# EAGLE board SparkFun_QwiicBus-Midpoint-Panel (EAGLE 9.6.2), part 1 of 3
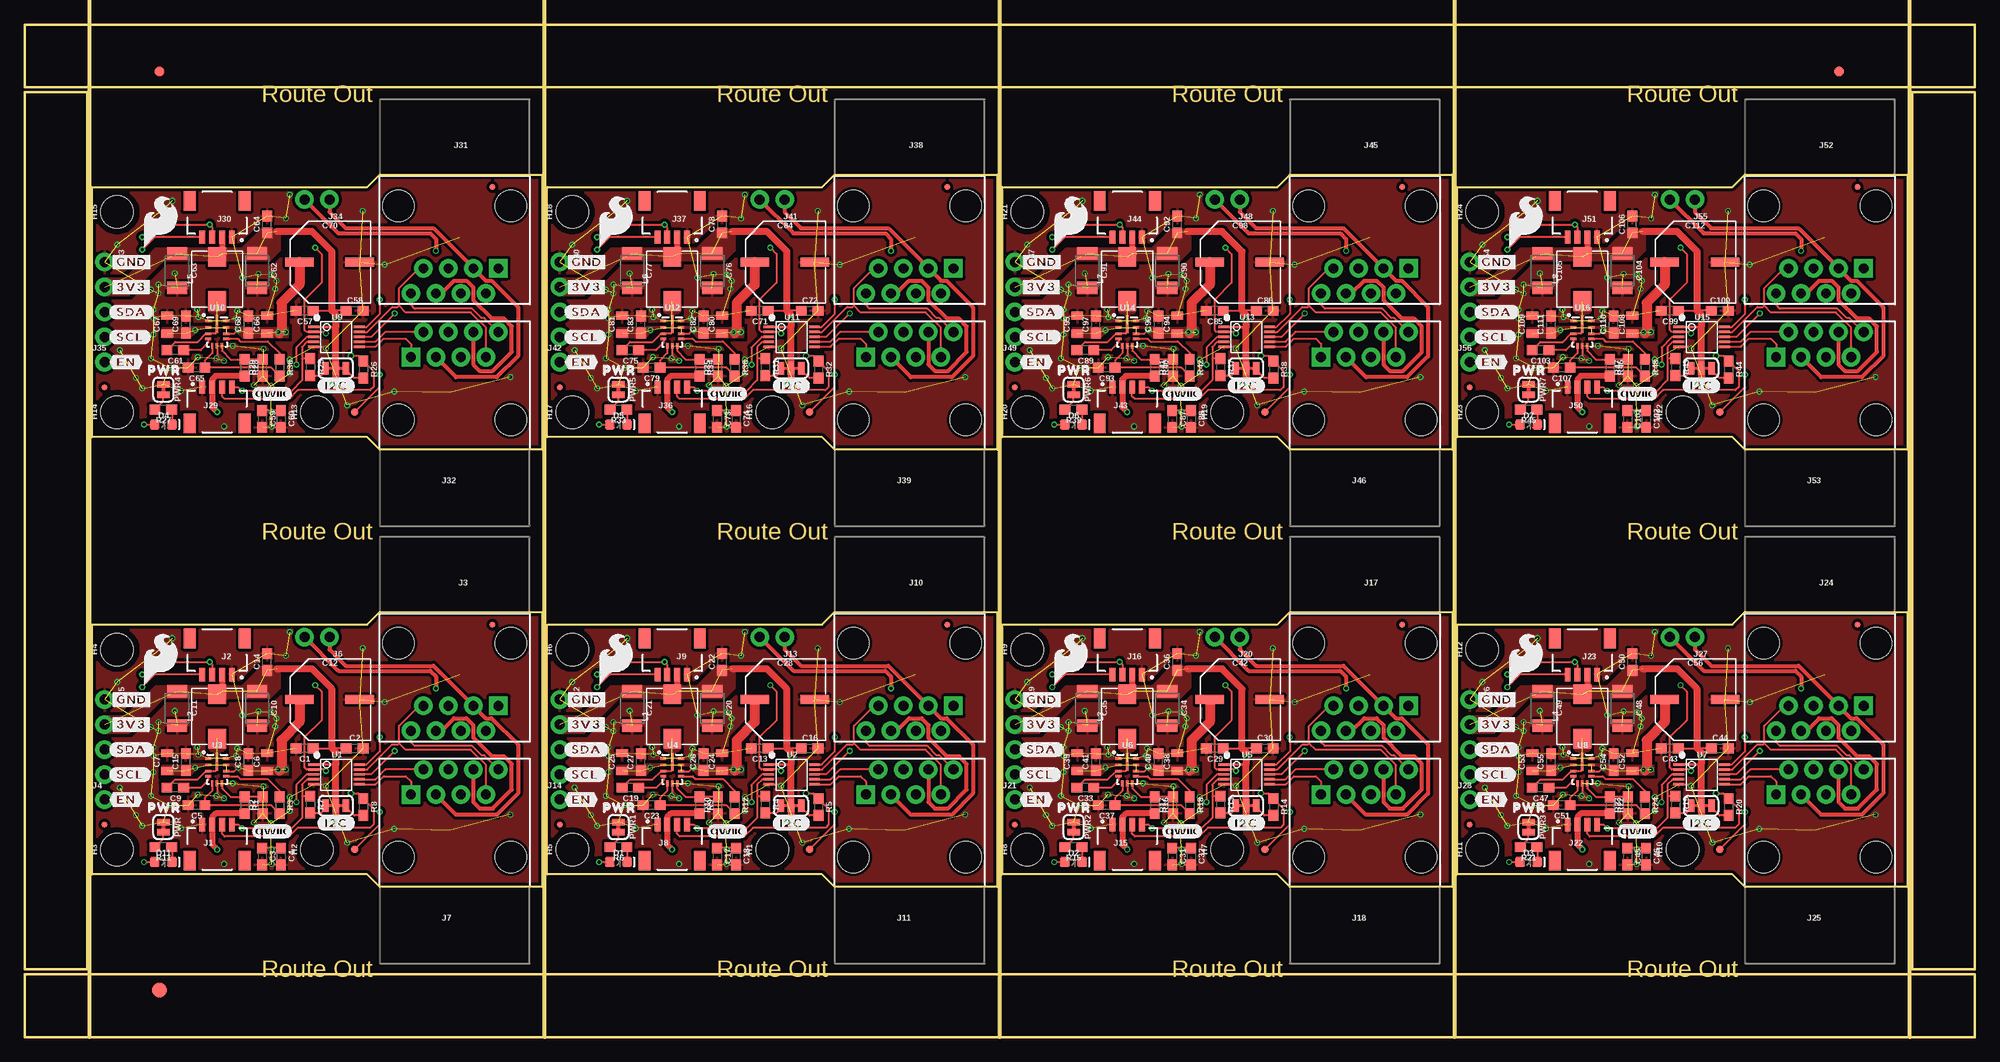
[diagram p0: board, top side]
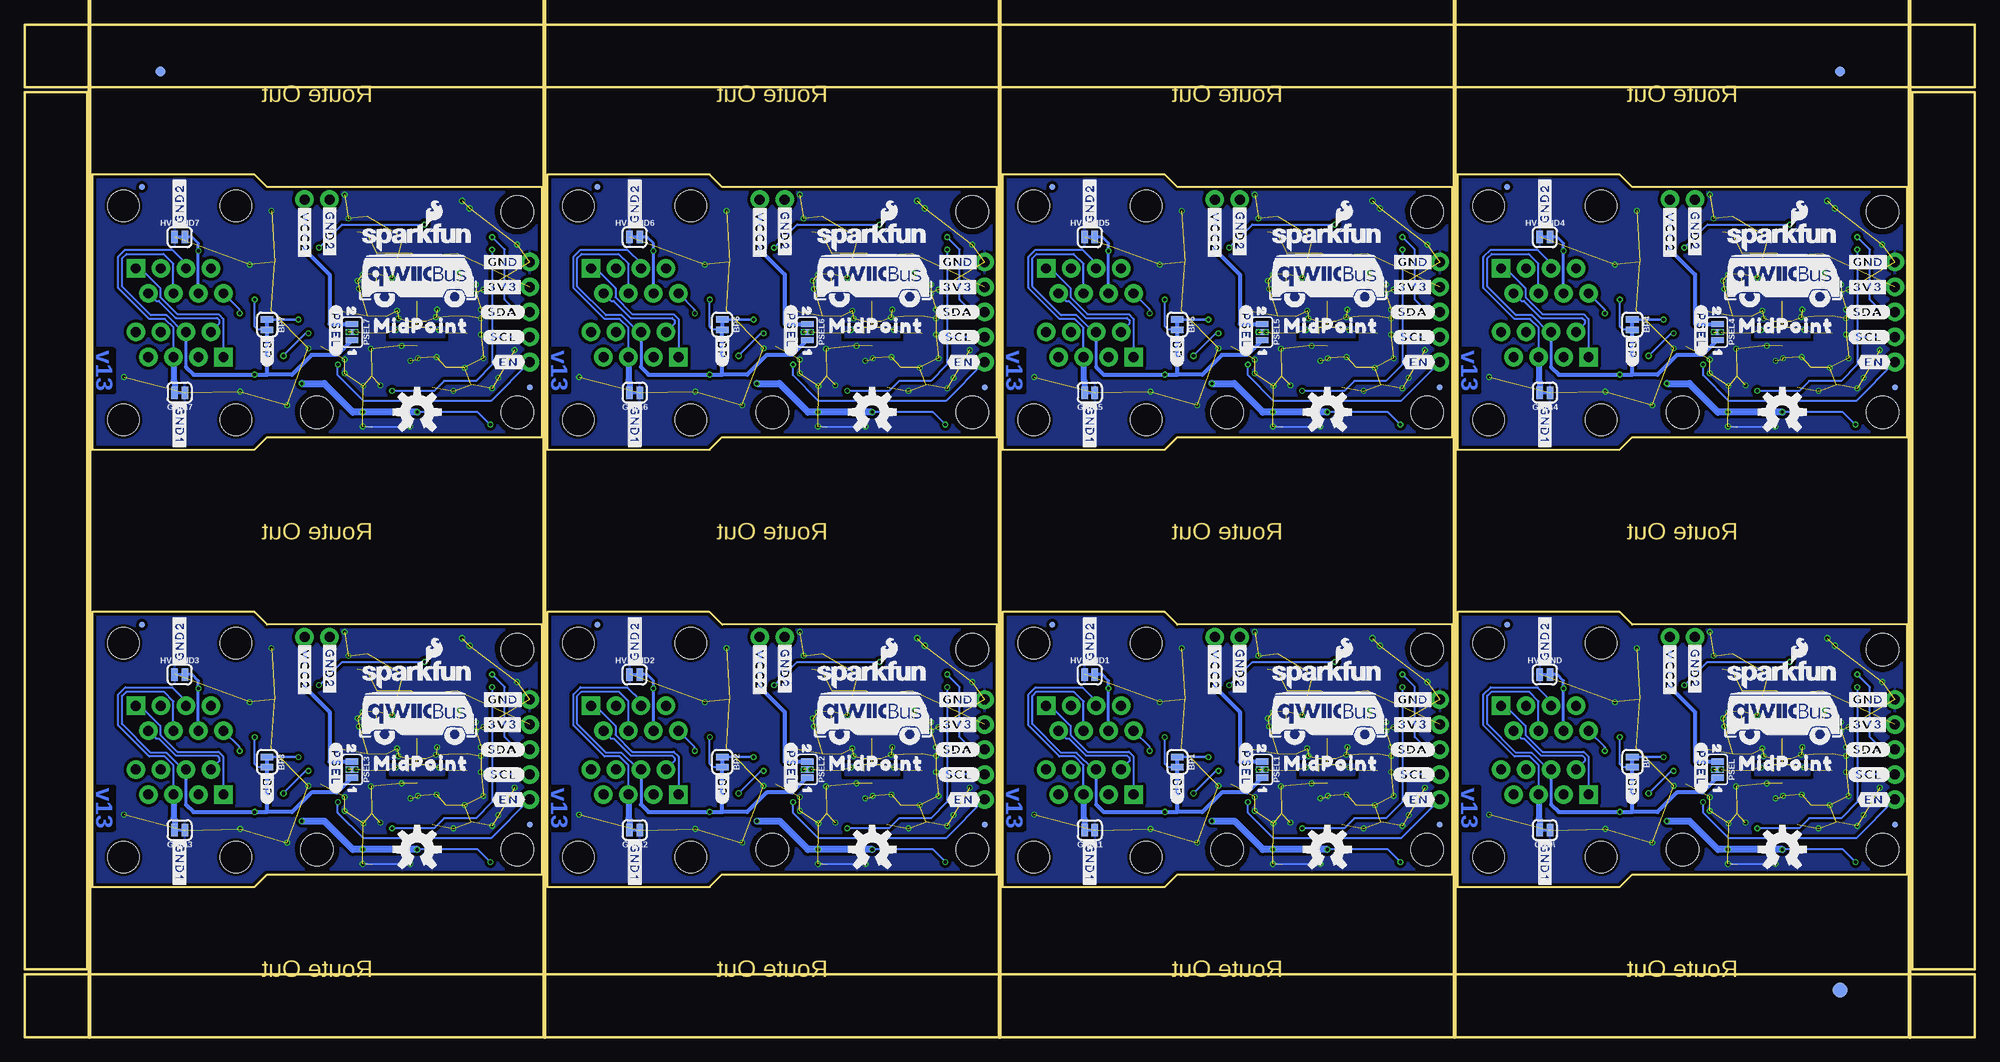
[diagram p1: board, bottom side, seen from below]

Size 198.12 x 102.87 mm. Coordinates in mm from the lower left corner, seen from the top.
Outline: 52.58,15.24 36.07,15.24 34.8,16.51 6.86,16.51 6.86,41.91 34.8,41.91 36.07,43.18 52.58,43.18 52.58,15.24
Outline: 98.81,15.24 82.3,15.24 81.03,16.51 53.09,16.51 53.09,41.91 81.03,41.91 82.3,43.18 98.81,43.18 98.81,15.24
Outline: 145.03,15.24 128.52,15.24 127.25,16.51 99.31,16.51 99.31,41.91 127.25,41.91 128.52,43.18 145.03,43.18 145.03,15.24
Outline: 191.26,15.24 174.75,15.24 173.48,16.51 145.54,16.51 145.54,41.91 173.48,41.91 174.75,43.18 191.26,43.18 191.26,15.24
Outline: 52.58,59.69 36.07,59.69 34.8,60.96 6.86,60.96 6.86,86.36 34.8,86.36 36.07,87.63 52.58,87.63 52.58,59.69
Outline: 98.81,59.69 82.3,59.69 81.03,60.96 53.09,60.96 53.09,86.36 81.03,86.36 82.3,87.63 98.81,87.63 98.81,59.69
Outline: 145.03,59.69 128.52,59.69 127.25,60.96 99.31,60.96 99.31,86.36 127.25,86.36 128.52,87.63 145.03,87.63 145.03,59.69
Outline: 191.26,59.69 174.75,59.69 173.48,60.96 145.54,60.96 145.54,86.36 173.48,86.36 174.75,87.63 191.26,87.63 191.26,59.69
Outline: 0,6.35 198.12,6.35 198.12,0 0,0 0,6.35
Outline: 191.77,96.01 198.12,96.01 198.12,6.86 191.77,6.86 191.77,96.01
Outline: 0,102.87 198.12,102.87 198.12,96.52 0,96.52 0,102.87
Outline: 0,96.01 6.35,96.01 6.35,6.86 0,6.86 0,96.01
Copper layers (1*16): Top 0.035mm / dielectric 1.5mm / Bottom 0.035mm
Design rules "SparkFun_QwiicBus-Midpoint": minimum track width 4mil, minimum drill 6mil, track to track 4mil, track to pad 4mil, pad to pad 4mil, via to via 4mil, smd to smd 4mil, copper to edge 4mil, drill to drill 4mil, minimum pad ring 5mil, minimum via ring 5mil, stop-mask expansion 4mil, vias tented up to drill 25mil, thermal gap 10mil
Net classes: 0 default: width 0.203 mm
Milling: 5 lines

## Footprints (pad centres in the part's own frame; a part is rotated, then mirrored left to right if it is on the bottom)
SMT-JUMPER_2_NC_TRACE_SILK = smd 0.66 x 1.27: 1 -0.521,0; 2 0.521,0
0603 = smd 1.1 x 1: 1 -0.85,0; 2 0.85,0
0805 = smd 0.8 x 1.2: 1 -0.9,0; 2 0.9,0
1210 = smd 1.27 x 2.06: 1 -1.755,0; 2 1.755,0
8X10.5 = smd 2.9 x 0.9: + -3.05,0; - 3.05,0
LED-0603 = smd 1 x 1: A -0.877,0; C 0.877,0
FIDUCIAL-1X2 = smd 1 x 1: 1 0,0
FIDUCIAL-1.5X3 = smd 1.5 x 1.5: 1 0,0
FIDUCIAL-MICRO = smd 0.635 x 0.635: 1 0,0
STAND-OFF = hole 3.302: 0,0
SMT-JUMPER_3_2-NC_TRACE_SILK = smd 0.66 x 1.27: 1 -1.041,0; 2 0,0; 3 1.041,0
JST04_1MM_RA = smd 0.6 x 1.35: 1 -1.5,0; 2 -0.5,0; 3 0.5,0; 4 1.5,0 | smd 1.2 x 2: NC1 2.8,-3.675; NC2 -2.8,-3.675
RJ45-8 = drill 1 pad 1.88 square: 1 -4.445,6.35 | drill 1 pad 1.88: 2 -3.175,8.89; 3 -1.905,6.35; 4 -0.635,8.89; 5 0.635,6.35; 6 1.905,8.89; 7 3.175,6.35; 8 4.445,8.89 | hole 3.2: -5.715,0; 5.715,0
1X01_NO_SILK = drill 1.016 pad 1.88: 1 0,0
1X04_NO_SILK = drill 1.016 pad 1.88: 1 0,0; 2 2.54,0; 3 5.08,0; 4 7.62,0
1X02_NO_SILK = drill 1.016 pad 1.88: 1 0,0; 2 2.54,0
INDUCTOR_5X5MM = smd 2 x 1.8: P$1 -2.25,0; P$2 2.25,0
SMT-JUMPER_3_NO_SILK = smd 0.635 x 1.27: 1 -0.813,0; 2 0,0; 3 0.813,0
PAD.03X.03 = smd 0.762 x 0.762: P$1 0,0
TSSOP10 = smd 1.1 x 0.25: 1 -2.259,1.018; 2 -2.259,0.517; 3 -2.259,0.018; 4 -2.259,-0.482; 5 -2.259,-0.988; 6 2.366,-0.988; 7 2.366,-0.482; 8 2.366,0.018; 9 2.366,0.517; 10 2.366,1.018
VQFN-HR-12 = smd 0.6 x 0.25: 1 -0.9,1.125; 2 -0.9,0.475; 3 -0.9,-0.175; 4 -0.9,-0.675; 8 0.9,-0.675; 9 0.9,-0.175; 10 0.9,0.475; 11 0.9,1.125 | smd 0.25 x 0.6: 5 -0.5,-1.4; 6 0,-1.4; 7 0.5,-1.4 | smd 0.25 x 1.824: 12 0,0.788

## Placement (x,y rotation side)
BP  JUMPER-SMT_2_NC_TRACE_SILK  [SMT-JUMPER_2_NC_TRACE_SILK]  34.8,27.94 270 bottom
BP1  JUMPER-SMT_2_NC_TRACE_SILK  [SMT-JUMPER_2_NC_TRACE_SILK]  81.03,27.94 270 bottom
BP2  JUMPER-SMT_2_NC_TRACE_SILK  [SMT-JUMPER_2_NC_TRACE_SILK]  127.25,27.94 270 bottom
BP3  JUMPER-SMT_2_NC_TRACE_SILK  [SMT-JUMPER_2_NC_TRACE_SILK]  173.48,27.94 270 bottom
BP4  JUMPER-SMT_2_NC_TRACE_SILK  [SMT-JUMPER_2_NC_TRACE_SILK]  34.8,72.39 270 bottom
BP5  JUMPER-SMT_2_NC_TRACE_SILK  [SMT-JUMPER_2_NC_TRACE_SILK]  81.03,72.39 270 bottom
BP6  JUMPER-SMT_2_NC_TRACE_SILK  [SMT-JUMPER_2_NC_TRACE_SILK]  127.25,72.39 270 bottom
BP7  JUMPER-SMT_2_NC_TRACE_SILK  [SMT-JUMPER_2_NC_TRACE_SILK]  173.48,72.39 270 bottom
C1  0.1uF  [0603]  28.45,29.34 180 top
C2  0.1uF  [0603]  33.53,29.34 0 top
C3  1.0uF  [0603]  24.13,18.35 270 top
C4  1.0uF  [0603]  26.04,18.35 270 top
C5  1.0uF  [0603]  17.46,23.56 180 top
C6  4.7uF  [0805]  24.64,27.94 90 top
C7  4.7uF  [0805]  14.48,27.94 90 top
C8  0.22uF  [0603]  22.73,27.94 90 top
C9  0.1uF  [0603]  15.3,25.34 180 top
C10  22uF  [1210]  23.62,33.4 270 top
C11  22uF  [1210]  15.49,33.4 270 top
C12  100uF  [8X10.5]  30.99,34.29 0 top
C13  0.1uF  [0603]  74.68,29.34 180 top
C14  0.1uF  [0603]  24.64,38.1 90 top
C15  0.22uF  [0603]  16.38,27.94 90 top
C16  0.1uF  [0603]  79.76,29.34 0 top
C17  1.0uF  [0603]  70.36,18.35 270 top
C18  1.0uF  [0603]  72.26,18.35 270 top
C19  0.1uF  [0603]  61.53,25.34 180 top
C20  22uF  [1210]  69.85,33.4 270 top
C21  22uF  [1210]  61.72,33.4 270 top
C22  0.1uF  [0603]  70.87,38.1 90 top
C23  1.0uF  [0603]  63.69,23.56 180 top
C24  4.7uF  [0805]  70.87,27.94 90 top
C25  4.7uF  [0805]  60.71,27.94 90 top
C26  0.22uF  [0603]  68.96,27.94 90 top
C27  0.22uF  [0603]  62.61,27.94 90 top
C28  100uF  [8X10.5]  77.21,34.29 0 top
C29  0.1uF  [0603]  120.9,29.34 180 top
C30  0.1uF  [0603]  125.98,29.34 0 top
C31  1.0uF  [0603]  116.59,18.35 270 top
C32  1.0uF  [0603]  118.49,18.35 270 top
C33  0.1uF  [0603]  107.76,25.34 180 top
C34  22uF  [1210]  116.08,33.4 270 top
C35  22uF  [1210]  107.95,33.4 270 top
C36  0.1uF  [0603]  117.09,38.1 90 top
C37  1.0uF  [0603]  109.92,23.56 180 top
C38  4.7uF  [0805]  117.09,27.94 90 top
C39  4.7uF  [0805]  106.93,27.94 90 top
C40  0.22uF  [0603]  115.19,27.94 90 top
C41  0.22uF  [0603]  108.84,27.94 90 top
C42  100uF  [8X10.5]  123.44,34.29 0 top
C43  0.1uF  [0603]  167.13,29.34 180 top
C44  0.1uF  [0603]  172.21,29.34 0 top
C45  1.0uF  [0603]  162.81,18.35 270 top
C46  1.0uF  [0603]  164.72,18.35 270 top
C47  0.1uF  [0603]  153.99,25.34 180 top
C48  22uF  [1210]  162.31,33.4 270 top
C49  22uF  [1210]  154.18,33.4 270 top
C50  0.1uF  [0603]  163.32,38.1 90 top
C51  1.0uF  [0603]  156.15,23.56 180 top
C52  4.7uF  [0805]  163.32,27.94 90 top
C53  4.7uF  [0805]  153.16,27.94 90 top
C54  0.22uF  [0603]  161.42,27.94 90 top
C55  0.22uF  [0603]  155.07,27.94 90 top
C56  100uF  [8X10.5]  169.67,34.29 0 top
C57  0.1uF  [0603]  28.45,73.79 180 top
C58  0.1uF  [0603]  33.53,73.79 0 top
C59  1.0uF  [0603]  24.13,62.8 270 top
C60  1.0uF  [0603]  26.04,62.8 270 top
C61  0.1uF  [0603]  15.3,69.79 180 top
C62  22uF  [1210]  23.62,77.85 270 top
C63  22uF  [1210]  15.49,77.85 270 top
C64  0.1uF  [0603]  24.64,82.55 90 top
C65  1.0uF  [0603]  17.46,68.01 180 top
C66  4.7uF  [0805]  24.64,72.39 90 top
C67  4.7uF  [0805]  14.48,72.39 90 top
C68  0.22uF  [0603]  22.73,72.39 90 top
C69  0.22uF  [0603]  16.38,72.39 90 top
C70  100uF  [8X10.5]  30.99,78.74 0 top
C71  0.1uF  [0603]  74.68,73.79 180 top
C72  0.1uF  [0603]  79.76,73.79 0 top
C73  1.0uF  [0603]  70.36,62.8 270 top
C74  1.0uF  [0603]  72.26,62.8 270 top
C75  0.1uF  [0603]  61.53,69.79 180 top
C76  22uF  [1210]  69.85,77.85 270 top
C77  22uF  [1210]  61.72,77.85 270 top
C78  0.1uF  [0603]  70.87,82.55 90 top
C79  1.0uF  [0603]  63.69,68.01 180 top
C80  4.7uF  [0805]  70.87,72.39 90 top
C81  4.7uF  [0805]  60.71,72.39 90 top
C82  0.22uF  [0603]  68.96,72.39 90 top
C83  0.22uF  [0603]  62.61,72.39 90 top
C84  100uF  [8X10.5]  77.21,78.74 0 top
C85  0.1uF  [0603]  120.9,73.79 180 top
C86  0.1uF  [0603]  125.98,73.79 0 top
C87  1.0uF  [0603]  116.59,62.8 270 top
C88  1.0uF  [0603]  118.49,62.8 270 top
C89  0.1uF  [0603]  107.76,69.79 180 top
C90  22uF  [1210]  116.08,77.85 270 top
C91  22uF  [1210]  107.95,77.85 270 top
C92  0.1uF  [0603]  117.09,82.55 90 top
C93  1.0uF  [0603]  109.92,68.01 180 top
C94  4.7uF  [0805]  117.09,72.39 90 top
C95  4.7uF  [0805]  106.93,72.39 90 top
C96  0.22uF  [0603]  115.19,72.39 90 top
C97  0.22uF  [0603]  108.84,72.39 90 top
C98  100uF  [8X10.5]  123.44,78.74 0 top
C99  0.1uF  [0603]  167.13,73.79 180 top
C100  0.1uF  [0603]  172.21,73.79 0 top
C101  1.0uF  [0603]  162.81,62.8 270 top
C102  1.0uF  [0603]  164.72,62.8 270 top
C103  0.1uF  [0603]  153.99,69.79 180 top
C104  22uF  [1210]  162.31,77.85 270 top
C105  22uF  [1210]  154.18,77.85 270 top
C106  0.1uF  [0603]  163.32,82.55 90 top
C107  1.0uF  [0603]  156.15,68.01 180 top
C108  4.7uF  [0805]  163.32,72.39 90 top
C109  4.7uF  [0805]  153.16,72.39 90 top
C110  0.22uF  [0603]  161.42,72.39 90 top
C111  0.22uF  [0603]  155.07,72.39 90 top
C112  100uF  [8X10.5]  169.67,78.74 0 top
D1  RED  [LED-0603]  60.32,17.78 0 top
D2  RED  [LED-0603]  106.55,17.78 0 top
D3  RED  [LED-0603]  152.78,17.78 0 top
D4  RED  [LED-0603]  14.1,62.23 0 top
D5  RED  [LED-0603]  60.32,62.23 0 top
D6  RED  [LED-0603]  106.55,62.23 0 top
D7  RED  [LED-0603]  152.78,62.23 0 top
D11  RED  [LED-0603]  14.1,17.78 0 top
E$1  [FIDUCIAL-1X2]  13.72,98.11 0 top
E$2  [FIDUCIAL-1X2]  13.72,98.11 0 bottom
E$3  [FIDUCIAL-1X2]  184.34,98.11 0 top
E$4  [FIDUCIAL-1X2]  184.34,98.11 0 bottom
E$5  [FIDUCIAL-1.5X3]  13.72,4.76 0 top
E$6  [FIDUCIAL-1.5X3]  13.72,4.76 0 bottom
FD1  FIDUCIALUFIDUCIAL  [FIDUCIAL-MICRO]  8.13,21.59 0 top
FD2  FIDUCIALUFIDUCIAL  [FIDUCIAL-MICRO]  47.5,41.91 0 top
FD3  FIDUCIALUFIDUCIAL  [FIDUCIAL-MICRO]  8.13,21.59 0 bottom
FD4  FIDUCIALUFIDUCIAL  [FIDUCIAL-MICRO]  47.5,41.91 0 bottom
FD5  FIDUCIALUFIDUCIAL  [FIDUCIAL-MICRO]  54.36,21.59 0 top
FD6  FIDUCIALUFIDUCIAL  [FIDUCIAL-MICRO]  93.73,41.91 0 top
FD7  FIDUCIALUFIDUCIAL  [FIDUCIAL-MICRO]  54.36,21.59 0 bottom
FD8  FIDUCIALUFIDUCIAL  [FIDUCIAL-MICRO]  93.73,41.91 0 bottom
FD9  FIDUCIALUFIDUCIAL  [FIDUCIAL-MICRO]  100.58,21.59 0 top
FD10  FIDUCIALUFIDUCIAL  [FIDUCIAL-MICRO]  139.95,41.91 0 top
FD11  FIDUCIALUFIDUCIAL  [FIDUCIAL-MICRO]  100.58,21.59 0 bottom
FD12  FIDUCIALUFIDUCIAL  [FIDUCIAL-MICRO]  139.95,41.91 0 bottom
FD13  FIDUCIALUFIDUCIAL  [FIDUCIAL-MICRO]  146.81,21.59 0 top
FD14  FIDUCIALUFIDUCIAL  [FIDUCIAL-MICRO]  186.18,41.91 0 top
FD15  FIDUCIALUFIDUCIAL  [FIDUCIAL-MICRO]  146.81,21.59 0 bottom
FD16  FIDUCIALUFIDUCIAL  [FIDUCIAL-MICRO]  186.18,41.91 0 bottom
FD17  FIDUCIALUFIDUCIAL  [FIDUCIAL-MICRO]  8.13,66.04 0 top
FD18  FIDUCIALUFIDUCIAL  [FIDUCIAL-MICRO]  47.5,86.36 0 top
FD19  FIDUCIALUFIDUCIAL  [FIDUCIAL-MICRO]  8.13,66.04 0 bottom
FD20  FIDUCIALUFIDUCIAL  [FIDUCIAL-MICRO]  47.5,86.36 0 bottom
FD21  FIDUCIALUFIDUCIAL  [FIDUCIAL-MICRO]  54.36,66.04 0 top
FD22  FIDUCIALUFIDUCIAL  [FIDUCIAL-MICRO]  93.73,86.36 0 top
FD23  FIDUCIALUFIDUCIAL  [FIDUCIAL-MICRO]  54.36,66.04 0 bottom
FD24  FIDUCIALUFIDUCIAL  [FIDUCIAL-MICRO]  93.73,86.36 0 bottom
FD25  FIDUCIALUFIDUCIAL  [FIDUCIAL-MICRO]  100.58,66.04 0 top
FD26  FIDUCIALUFIDUCIAL  [FIDUCIAL-MICRO]  139.95,86.36 0 top
FD27  FIDUCIALUFIDUCIAL  [FIDUCIAL-MICRO]  100.58,66.04 0 bottom
FD28  FIDUCIALUFIDUCIAL  [FIDUCIAL-MICRO]  139.95,86.36 0 bottom
FD29  FIDUCIALUFIDUCIAL  [FIDUCIAL-MICRO]  146.81,66.04 0 top
FD30  FIDUCIALUFIDUCIAL  [FIDUCIAL-MICRO]  186.18,86.36 0 top
FD31  FIDUCIALUFIDUCIAL  [FIDUCIAL-MICRO]  146.81,66.04 0 bottom
FD32  FIDUCIALUFIDUCIAL  [FIDUCIAL-MICRO]  186.18,86.36 0 bottom
GND\  JUMPER-SMT_2_NC_TRACE_SILK  [SMT-JUMPER_2_NC_TRACE_SILK]  43.69,21.02 180 bottom
GND\1  JUMPER-SMT_2_NC_TRACE_SILK  [SMT-JUMPER_2_NC_TRACE_SILK]  89.92,21.02 180 bottom
GND\2  JUMPER-SMT_2_NC_TRACE_SILK  [SMT-JUMPER_2_NC_TRACE_SILK]  136.14,21.02 180 bottom
GND\3  JUMPER-SMT_2_NC_TRACE_SILK  [SMT-JUMPER_2_NC_TRACE_SILK]  182.37,21.02 180 bottom
GND\4  JUMPER-SMT_2_NC_TRACE_SILK  [SMT-JUMPER_2_NC_TRACE_SILK]  43.69,65.47 180 bottom
GND\5  JUMPER-SMT_2_NC_TRACE_SILK  [SMT-JUMPER_2_NC_TRACE_SILK]  89.92,65.47 180 bottom
GND\6  JUMPER-SMT_2_NC_TRACE_SILK  [SMT-JUMPER_2_NC_TRACE_SILK]  136.14,65.47 180 bottom
GND\7  JUMPER-SMT_2_NC_TRACE_SILK  [SMT-JUMPER_2_NC_TRACE_SILK]  182.37,65.47 180 bottom
H1  STAND-OFF  [STAND-OFF]  75.95,19.05 90 top
H2  STAND-OFF  [STAND-OFF]  29.72,19.05 90 top
H3  STAND-OFF  [STAND-OFF]  9.4,19.05 90 top
H4  STAND-OFF  [STAND-OFF]  9.4,39.37 90 top
H5  STAND-OFF  [STAND-OFF]  55.63,19.05 90 top
H6  STAND-OFF  [STAND-OFF]  55.63,39.37 90 top
H7  STAND-OFF  [STAND-OFF]  122.17,19.05 90 top
H8  STAND-OFF  [STAND-OFF]  101.85,19.05 90 top
H9  STAND-OFF  [STAND-OFF]  101.85,39.37 90 top
H10  STAND-OFF  [STAND-OFF]  168.4,19.05 90 top
H11  STAND-OFF  [STAND-OFF]  148.08,19.05 90 top
H12  STAND-OFF  [STAND-OFF]  148.08,39.37 90 top
H13  STAND-OFF  [STAND-OFF]  29.72,63.5 90 top
H14  STAND-OFF  [STAND-OFF]  9.4,63.5 90 top
H15  STAND-OFF  [STAND-OFF]  9.4,83.82 90 top
H16  STAND-OFF  [STAND-OFF]  75.95,63.5 90 top
H17  STAND-OFF  [STAND-OFF]  55.63,63.5 90 top
H18  STAND-OFF  [STAND-OFF]  55.63,83.82 90 top
H19  STAND-OFF  [STAND-OFF]  122.17,63.5 90 top
H20  STAND-OFF  [STAND-OFF]  101.85,63.5 90 top
H21  STAND-OFF  [STAND-OFF]  101.85,83.82 90 top
H22  STAND-OFF  [STAND-OFF]  168.4,63.5 90 top
H23  STAND-OFF  [STAND-OFF]  148.08,63.5 90 top
H24  STAND-OFF  [STAND-OFF]  148.08,83.82 90 top
HV_GND  JUMPER-SMT_2_NC_TRACE_SILK  [SMT-JUMPER_2_NC_TRACE_SILK]  43.69,36.83 0 bottom
HV_GND1  JUMPER-SMT_2_NC_TRACE_SILK  [SMT-JUMPER_2_NC_TRACE_SILK]  89.92,36.83 0 bottom
HV_GND2  JUMPER-SMT_2_NC_TRACE_SILK  [SMT-JUMPER_2_NC_TRACE_SILK]  136.14,36.83 0 bottom
HV_GND3  JUMPER-SMT_2_NC_TRACE_SILK  [SMT-JUMPER_2_NC_TRACE_SILK]  182.37,36.83 0 bottom
HV_GND4  JUMPER-SMT_2_NC_TRACE_SILK  [SMT-JUMPER_2_NC_TRACE_SILK]  43.69,81.28 0 bottom
HV_GND5  JUMPER-SMT_2_NC_TRACE_SILK  [SMT-JUMPER_2_NC_TRACE_SILK]  89.92,81.28 0 bottom
HV_GND6  JUMPER-SMT_2_NC_TRACE_SILK  [SMT-JUMPER_2_NC_TRACE_SILK]  136.14,81.28 0 bottom
HV_GND7  JUMPER-SMT_2_NC_TRACE_SILK  [SMT-JUMPER_2_NC_TRACE_SILK]  182.37,81.28 0 bottom
I2C  JUMPER-SMT_3_2-NC_TRACE_SILK  [SMT-JUMPER_3_2-NC_TRACE_SILK]  31.62,23.5 180 top
I2C1  JUMPER-SMT_3_2-NC_TRACE_SILK  [SMT-JUMPER_3_2-NC_TRACE_SILK]  77.85,23.5 180 top
I2C2  JUMPER-SMT_3_2-NC_TRACE_SILK  [SMT-JUMPER_3_2-NC_TRACE_SILK]  124.08,23.5 180 top
I2C3  JUMPER-SMT_3_2-NC_TRACE_SILK  [SMT-JUMPER_3_2-NC_TRACE_SILK]  170.31,23.5 180 top
I2C4  JUMPER-SMT_3_2-NC_TRACE_SILK  [SMT-JUMPER_3_2-NC_TRACE_SILK]  31.62,67.94 180 top
I2C5  JUMPER-SMT_3_2-NC_TRACE_SILK  [SMT-JUMPER_3_2-NC_TRACE_SILK]  77.85,67.94 180 top
I2C6  JUMPER-SMT_3_2-NC_TRACE_SILK  [SMT-JUMPER_3_2-NC_TRACE_SILK]  124.08,67.94 180 top
I2C7  JUMPER-SMT_3_2-NC_TRACE_SILK  [SMT-JUMPER_3_2-NC_TRACE_SILK]  170.31,67.94 180 top
J1  QWIIC  [JST04_1MM_RA]  19.56,21.59 0 top
J2  QWIIC  [JST04_1MM_RA]  19.56,36.83 180 top
J3  RJ45  [RJ45-8]  43.69,40 180 top
J4  [1X01_NO_SILK]  8.13,24.13 0 top
J5  [1X04_NO_SILK]  8.13,34.29 270 top
J6  [1X02_NO_SILK]  30.99,40.64 180 top
J7  RJ45  [RJ45-8]  43.69,18.29 0 top
J8  QWIIC  [JST04_1MM_RA]  65.79,21.59 0 top
J9  QWIIC  [JST04_1MM_RA]  65.79,36.83 180 top
J10  RJ45  [RJ45-8]  89.92,40 180 top
J11  RJ45  [RJ45-8]  89.92,18.29 0 top
J12  [1X04_NO_SILK]  54.36,34.29 270 top
J13  [1X02_NO_SILK]  77.22,40.64 180 top
J14  [1X01_NO_SILK]  54.36,24.13 0 top
J15  QWIIC  [JST04_1MM_RA]  112.01,21.59 0 top
J16  QWIIC  [JST04_1MM_RA]  112.01,36.83 180 top
J17  RJ45  [RJ45-8]  136.14,40 180 top
J18  RJ45  [RJ45-8]  136.14,18.29 0 top
J19  [1X04_NO_SILK]  100.58,34.29 270 top
J20  [1X02_NO_SILK]  123.44,40.64 180 top
J21  [1X01_NO_SILK]  100.58,24.13 0 top
J22  QWIIC  [JST04_1MM_RA]  158.24,21.59 0 top
J23  QWIIC  [JST04_1MM_RA]  158.24,36.83 180 top
J24  RJ45  [RJ45-8]  182.37,40 180 top
J25  RJ45  [RJ45-8]  182.37,18.29 0 top
J26  [1X04_NO_SILK]  146.81,34.29 270 top
J27  [1X02_NO_SILK]  169.67,40.64 180 top
J28  [1X01_NO_SILK]  146.81,24.13 0 top
J29  QWIIC  [JST04_1MM_RA]  19.56,66.04 0 top
J30  QWIIC  [JST04_1MM_RA]  19.56,81.28 180 top
J31  RJ45  [RJ45-8]  43.69,84.45 180 top
J32  RJ45  [RJ45-8]  43.69,62.74 0 top
J33  [1X04_NO_SILK]  8.13,78.74 270 top
J34  [1X02_NO_SILK]  30.99,85.09 180 top
J35  [1X01_NO_SILK]  8.13,68.58 0 top
J36  QWIIC  [JST04_1MM_RA]  65.79,66.04 0 top
J37  QWIIC  [JST04_1MM_RA]  65.79,81.28 180 top
J38  RJ45  [RJ45-8]  89.92,84.45 180 top
J39  RJ45  [RJ45-8]  89.92,62.74 0 top
J40  [1X04_NO_SILK]  54.36,78.74 270 top
J41  [1X02_NO_SILK]  77.22,85.09 180 top
J42  [1X01_NO_SILK]  54.36,68.58 0 top
J43  QWIIC  [JST04_1MM_RA]  112.01,66.04 0 top
J44  QWIIC  [JST04_1MM_RA]  112.01,81.28 180 top
J45  RJ45  [RJ45-8]  136.14,84.45 180 top
J46  RJ45  [RJ45-8]  136.14,62.74 0 top
J47  [1X04_NO_SILK]  100.58,78.74 270 top
J48  [1X02_NO_SILK]  123.44,85.09 180 top
J49  [1X01_NO_SILK]  100.58,68.58 0 top
J50  QWIIC  [JST04_1MM_RA]  158.24,66.04 0 top
J51  QWIIC  [JST04_1MM_RA]  158.24,81.28 180 top
J52  RJ45  [RJ45-8]  182.37,84.45 180 top
J53  RJ45  [RJ45-8]  182.37,62.74 0 top
J54  [1X04_NO_SILK]  146.81,78.74 270 top
J55  [1X02_NO_SILK]  169.67,85.09 180 top
J56  [1X01_NO_SILK]  146.81,68.58 0 top
L1  2.2uH  [INDUCTOR_5X5MM]  65.79,32.58 90 top
L2  2.2uH  [INDUCTOR_5X5MM]  19.56,32.58 90 top
L3  2.2uH  [INDUCTOR_5X5MM]  112.01,32.58 90 top
L4  2.2uH  [INDUCTOR_5X5MM]  158.24,32.58 90 top
L5  2.2uH  [INDUCTOR_5X5MM]  19.56,77.03 90 top
L6  2.2uH  [INDUCTOR_5X5MM]  65.79,77.03 90 top
L7  2.2uH  [INDUCTOR_5X5MM]  112.01,77.03 90 top
L8  2.2uH  [INDUCTOR_5X5MM]  158.24,77.03 90 top
LOGO1  OSHW-LOGOM  [OSHW-LOGO-M]  19.56,19.05 0 bottom
LOGO2  OSHW-LOGOM  [OSHW-LOGO-M]  65.79,19.05 0 bottom
LOGO3  SFE_LOGO_FLAME.2_INCH  [SFE_LOGO_FLAME_.2]  13.84,38.35 0 top
LOGO4  SFE_LOGO_NAME_FLAME.1_INCH  [SFE_LOGO_NAME_FLAME_.1]  19.56,36.83 0 bottom
LOGO5  SFE_LOGO_FLAME.2_INCH  [SFE_LOGO_FLAME_.2]  60.07,38.35 0 top
LOGO6  SFE_LOGO_NAME_FLAME.1_INCH  [SFE_LOGO_NAME_FLAME_.1]  65.79,36.83 0 bottom
LOGO7  OSHW-LOGOM  [OSHW-LOGO-M]  112.01,19.05 0 bottom
LOGO8  SFE_LOGO_FLAME.2_INCH  [SFE_LOGO_FLAME_.2]  106.3,38.35 0 top
LOGO9  SFE_LOGO_NAME_FLAME.1_INCH  [SFE_LOGO_NAME_FLAME_.1]  112.01,36.83 0 bottom
LOGO10  OSHW-LOGOM  [OSHW-LOGO-M]  158.24,19.05 0 bottom
LOGO11  SFE_LOGO_FLAME.2_INCH  [SFE_LOGO_FLAME_.2]  152.53,38.35 0 top
LOGO12  SFE_LOGO_NAME_FLAME.1_INCH  [SFE_LOGO_NAME_FLAME_.1]  158.24,36.83 0 bottom
LOGO13  OSHW-LOGOM  [OSHW-LOGO-M]  19.56,63.5 0 bottom
LOGO14  SFE_LOGO_FLAME.2_INCH  [SFE_LOGO_FLAME_.2]  13.84,82.8 0 top
LOGO15  SFE_LOGO_NAME_FLAME.1_INCH  [SFE_LOGO_NAME_FLAME_.1]  19.56,81.28 0 bottom
LOGO16  OSHW-LOGOM  [OSHW-LOGO-M]  65.79,63.5 0 bottom
LOGO17  SFE_LOGO_FLAME.2_INCH  [SFE_LOGO_FLAME_.2]  60.07,82.8 0 top
LOGO18  SFE_LOGO_NAME_FLAME.1_INCH  [SFE_LOGO_NAME_FLAME_.1]  65.79,81.28 0 bottom
LOGO19  OSHW-LOGOM  [OSHW-LOGO-M]  112.01,63.5 0 bottom
LOGO20  SFE_LOGO_FLAME.2_INCH  [SFE_LOGO_FLAME_.2]  106.3,82.8 0 top
LOGO21  SFE_LOGO_NAME_FLAME.1_INCH  [SFE_LOGO_NAME_FLAME_.1]  112.01,81.28 0 bottom
LOGO22  OSHW-LOGOM  [OSHW-LOGO-M]  158.24,63.5 0 bottom
LOGO23  SFE_LOGO_FLAME.2_INCH  [SFE_LOGO_FLAME_.2]  152.53,82.8 0 top
LOGO24  SFE_LOGO_NAME_FLAME.1_INCH  [SFE_LOGO_NAME_FLAME_.1]  158.24,81.28 0 bottom
PSEL  JUMPER-SMT_3_NO_SILK  [SMT-JUMPER_3_NO_SILK]  26.16,27.18 270 bottom
PSEL1  JUMPER-SMT_3_NO_SILK  [SMT-JUMPER_3_NO_SILK]  72.39,27.18 270 bottom
PSEL2  JUMPER-SMT_3_NO_SILK  [SMT-JUMPER_3_NO_SILK]  118.62,27.18 270 bottom
PSEL3  JUMPER-SMT_3_NO_SILK  [SMT-JUMPER_3_NO_SILK]  164.85,27.18 270 bottom
PSEL4  JUMPER-SMT_3_NO_SILK  [SMT-JUMPER_3_NO_SILK]  26.16,71.63 270 bottom
PSEL5  JUMPER-SMT_3_NO_SILK  [SMT-JUMPER_3_NO_SILK]  72.39,71.63 270 bottom
PSEL6  JUMPER-SMT_3_NO_SILK  [SMT-JUMPER_3_NO_SILK]  118.62,71.63 270 bottom
PSEL7  JUMPER-SMT_3_NO_SILK  [SMT-JUMPER_3_NO_SILK]  164.85,71.63 270 bottom
PWR  JUMPER-SMT_2_NC_TRACE_SILK  [SMT-JUMPER_2_NC_TRACE_SILK]  14.1,21.34 270 top
PWR1  JUMPER-SMT_2_NC_TRACE_SILK  [SMT-JUMPER_2_NC_TRACE_SILK]  60.32,21.34 270 top
PWR2  JUMPER-SMT_2_NC_TRACE_SILK  [SMT-JUMPER_2_NC_TRACE_SILK]  106.55,21.34 270 top
PWR3  JUMPER-SMT_2_NC_TRACE_SILK  [SMT-JUMPER_2_NC_TRACE_SILK]  152.78,21.34 270 top
PWR4  JUMPER-SMT_2_NC_TRACE_SILK  [SMT-JUMPER_2_NC_TRACE_SILK]  14.1,65.79 270 top
PWR5  JUMPER-SMT_2_NC_TRACE_SILK  [SMT-JUMPER_2_NC_TRACE_SILK]  60.32,65.79 270 top
PWR6  JUMPER-SMT_2_NC_TRACE_SILK  [SMT-JUMPER_2_NC_TRACE_SILK]  106.55,65.79 270 top
PWR7  JUMPER-SMT_2_NC_TRACE_SILK  [SMT-JUMPER_2_NC_TRACE_SILK]  152.78,65.79 270 top
R1  100k  [0603]  22.35,23.56 270 top
R2  43k  [0603]  24.19,23.56 90 top
R3  100k  [0603]  25.91,23.56 270 top
R4  4.7k  [0603]  75.25,23.62 270 top
R5  4.7k  [0603]  80.65,23.37 270 top
R6  1k  [0603]  60.32,19.3 180 top
R7  4.7k  [0603]  29.02,23.62 270 top
R8  4.7k  [0603]  34.42,23.37 270 top
R9  100k  [0603]  68.58,23.56 270 top
R10  43k  [0603]  70.42,23.56 90 top
R11  1k  [0603]  14.1,19.3 180 top
R12  100k  [0603]  72.14,23.56 270 top
R13  4.7k  [0603]  121.48,23.62 270 top
R14  4.7k  [0603]  126.87,23.37 270 top
R15  1k  [0603]  106.55,19.3 180 top
R16  100k  [0603]  114.81,23.56 270 top
R17  43k  [0603]  116.65,23.56 90 top
R18  100k  [0603]  118.36,23.56 270 top
R19  4.7k  [0603]  167.7,23.62 270 top
R20  4.7k  [0603]  173.1,23.37 270 top
R21  1k  [0603]  152.78,19.3 180 top
R22  100k  [0603]  161.04,23.56 270 top
R23  43k  [0603]  162.88,23.56 90 top
R24  100k  [0603]  164.59,23.56 270 top
R25  4.7k  [0603]  29.02,68.07 270 top
R26  4.7k  [0603]  34.42,67.82 270 top
R27  1k  [0603]  14.1,63.75 180 top
R28  100k  [0603]  22.35,68.01 270 top
R29  43k  [0603]  24.19,68.01 90 top
R30  100k  [0603]  25.91,68.01 270 top
R31  4.7k  [0603]  75.25,68.07 270 top
R32  4.7k  [0603]  80.65,67.82 270 top
R33  1k  [0603]  60.32,63.75 180 top
R34  100k  [0603]  68.58,68.01 270 top
R35  43k  [0603]  70.42,68.01 90 top
R36  100k  [0603]  72.14,68.01 270 top
R37  4.7k  [0603]  121.48,68.07 270 top
R38  4.7k  [0603]  126.87,67.82 270 top
R39  1k  [0603]  106.55,63.75 180 top
R40  100k  [0603]  114.81,68.01 270 top
R41  43k  [0603]  116.65,68.01 90 top
R42  100k  [0603]  118.36,68.01 270 top
R43  4.7k  [0603]  167.7,68.07 270 top
R44  4.7k  [0603]  173.1,67.82 270 top
R45  1k  [0603]  152.78,63.75 180 top
R46  100k  [0603]  161.04,68.01 270 top
R47  43k  [0603]  162.88,68.01 90 top
R48  100k  [0603]  164.59,68.01 270 top
TP1  TEST-POINT3  [PAD.03X.03]  33.53,19.05 0 top
TP2  TEST-POINT3  [PAD.03X.03]  79.76,19.05 0 top
TP3  TEST-POINT3  [PAD.03X.03]  125.98,19.05 0 top
TP4  TEST-POINT3  [PAD.03X.03]  172.21,19.05 0 top
TP5  TEST-POINT3  [PAD.03X.03]  33.53,63.5 0 top
TP6  TEST-POINT3  [PAD.03X.03]  79.76,63.5 0 top
TP7  TEST-POINT3  [PAD.03X.03]  125.98,63.5 0 top
TP8  TEST-POINT3  [PAD.03X.03]  172.21,63.5 0 top
U1  PCA9615  [TSSOP10]  31.62,26.67 0 top
U2  PCA9615  [TSSOP10]  77.85,26.67 0 top
U3  LMR33630  [VQFN-HR-12]  19.56,27.18 0 top
U4  LMR33630  [VQFN-HR-12]  65.79,27.18 0 top
U5  PCA9615  [TSSOP10]  124.08,26.67 0 top
U6  LMR33630  [VQFN-HR-12]  112.01,27.18 0 top
U7  PCA9615  [TSSOP10]  170.31,26.67 0 top
U8  LMR33630  [VQFN-HR-12]  158.24,27.18 0 top
U9  PCA9615  [TSSOP10]  31.62,71.12 0 top
U10  LMR33630  [VQFN-HR-12]  19.56,71.63 0 top
U11  PCA9615  [TSSOP10]  77.85,71.12 0 top
U12  LMR33630  [VQFN-HR-12]  65.79,71.63 0 top
U13  PCA9615  [TSSOP10]  124.08,71.12 0 top
U14  LMR33630  [VQFN-HR-12]  112.01,71.63 0 top
U15  PCA9615  [TSSOP10]  170.31,71.12 0 top
U16  LMR33630  [VQFN-HR-12]  158.24,71.63 0 top
U$1  [#GND#0]  8.64,34.29 0 top
U$2  [#3V3#0]  8.64,31.75 0 top
U$3  [#SDA#0]  8.64,29.21 0 top
U$4  [#SCL#0]  8.64,26.67 0 top
U$5  [#BP#0]  34.8,26.99 270 bottom
U$6  [#EN#0]  8.64,24.13 0 top
U$7  [#GND#0]  13.08,34.29 0 bottom
U$8  [#3V3#0]  13.08,31.75 0 bottom
U$9  [#SDA#0]  13.08,29.21 0 bottom
U$10  [#SCL#0]  12.83,26.67 0 bottom
U$11  [#GND2#0]  43.69,37.53 90 bottom
U$12  [#EN#0]  11.94,24.13 0 bottom
U$13  [#I2C#0]  29.78,21.72 0 top
U$14  [#GND1#0]  43.69,20.32 270 bottom
U$15  [QWIICBUS#WORKING#LOGO#JPG]  19.05,32.77 0 bottom
U$16  [#VCC2#0]  30.99,40.07 270 bottom
U$17  [#PSEL#0]  27.81,29.84 270 bottom
U$18  [10]  26.16,26.1 270 bottom
U$19  [20]  26.23,30.42 270 bottom
U$20  [#GND#0]  54.86,34.29 0 top
U$21  [#3V3#0]  54.86,31.75 0 top
U$22  [QWIIC_4MM]  25.15,20.89 0 top
U$23  [PWR0]  11.81,23.3 0 top
U$24  [#GND2#0]  28.45,40.13 270 bottom
U$25  [#SDA#0]  54.86,29.21 0 top
U$26  [#SCL#0]  54.86,26.67 0 top
U$27  [#EN#0]  54.86,24.13 0 top
U$28  [#GND#0]  59.31,34.29 0 bottom
U$29  [#3V3#0]  59.31,31.75 0 bottom
U$30  [MIDPOINT0]  25.02,27.81 0 bottom
U$31  [#SDA#0]  59.31,29.21 0 bottom
U$32  [#SCL#0]  59.05,26.67 0 bottom
U$33  [#EN#0]  58.17,24.13 0 bottom
U$34  [QWIIC_4MM]  71.37,20.89 0 top
U$35  [PWR0]  58.04,23.3 0 top
U$36  [MIDPOINT0]  71.25,27.81 0 bottom
U$37  [QWIICBUS#WORKING#LOGO#JPG]  65.28,32.77 0 bottom
U$38  [#I2C#0]  76.01,21.72 0 top
U$39  [#VCC2#0]  77.22,40.07 270 bottom
U$40  [#GND2#0]  74.68,40.13 270 bottom
U$41  [#PSEL#0]  74.04,29.84 270 bottom
U$42  [10]  72.39,26.1 270 bottom
U$43  [20]  72.45,30.42 270 bottom
U$44  [#GND2#0]  89.92,37.53 90 bottom
U$45  [#GND1#0]  89.92,20.32 270 bottom
U$46  [#BP#0]  81.03,26.99 270 bottom
U$47  [#GND#0]  101.09,34.29 0 top
U$48  [#3V3#0]  101.09,31.75 0 top
U$49  [#SDA#0]  101.09,29.21 0 top
U$50  [#SCL#0]  101.09,26.67 0 top
U$51  [#EN#0]  101.09,24.13 0 top
U$52  [#GND#0]  105.54,34.29 0 bottom
U$53  [#3V3#0]  105.54,31.75 0 bottom
U$54  [#SDA#0]  105.54,29.21 0 bottom
U$55  [#SCL#0]  105.28,26.67 0 bottom
U$56  [#EN#0]  104.39,24.13 0 bottom
U$57  [QWIIC_4MM]  117.6,20.89 0 top
U$58  [PWR0]  104.27,23.3 0 top
U$59  [MIDPOINT0]  117.48,27.81 0 bottom
U$60  [QWIICBUS#WORKING#LOGO#JPG]  111.51,32.77 0 bottom
U$61  [#I2C#0]  122.24,21.72 0 top
U$62  [#VCC2#0]  123.44,40.07 270 bottom
U$63  [#GND2#0]  120.9,40.13 270 bottom
U$64  [#PSEL#0]  120.27,29.84 270 bottom
U$65  [10]  118.62,26.1 270 bottom
U$66  [20]  118.68,30.42 270 bottom
U$67  [#GND2#0]  136.14,37.53 90 bottom
U$68  [#GND1#0]  136.14,20.32 270 bottom
U$69  [#BP#0]  127.25,26.99 270 bottom
U$70  [#GND#0]  147.32,34.29 0 top
U$71  [#3V3#0]  147.32,31.75 0 top
U$72  [#SDA#0]  147.32,29.21 0 top
U$73  [#SCL#0]  147.32,26.67 0 top
U$74  [#EN#0]  147.32,24.13 0 top
U$75  [#GND#0]  151.77,34.29 0 bottom
U$76  [#3V3#0]  151.77,31.75 0 bottom
U$77  [#SDA#0]  151.77,29.21 0 bottom
U$78  [#SCL#0]  151.51,26.67 0 bottom
U$79  [#EN#0]  150.62,24.13 0 bottom
U$80  [QWIIC_4MM]  163.83,20.89 0 top
U$81  [PWR0]  150.5,23.3 0 top
U$82  [MIDPOINT0]  163.7,27.81 0 bottom
U$83  [QWIICBUS#WORKING#LOGO#JPG]  157.73,32.77 0 bottom
U$84  [#I2C#0]  168.47,21.72 0 top
U$85  [#VCC2#0]  169.67,40.07 270 bottom
U$86  [#GND2#0]  167.13,40.13 270 bottom
U$87  [#PSEL#0]  166.5,29.84 270 bottom
U$88  [10]  164.85,26.1 270 bottom
U$89  [20]  164.91,30.42 270 bottom
U$90  [#GND2#0]  182.37,37.53 90 bottom
U$91  [#GND1#0]  182.37,20.32 270 bottom
U$92  [#BP#0]  173.48,26.99 270 bottom
U$93  [#GND#0]  8.64,78.74 0 top
U$94  [#3V3#0]  8.64,76.2 0 top
U$95  [#SDA#0]  8.64,73.66 0 top
U$96  [#SCL#0]  8.64,71.12 0 top
U$97  [#EN#0]  8.64,68.58 0 top
U$98  [#GND#0]  13.08,78.74 0 bottom
U$99  [#3V3#0]  13.08,76.2 0 bottom
U$100  [#SDA#0]  13.08,73.66 0 bottom
U$101  [#SCL#0]  12.83,71.12 0 bottom
U$102  [#EN#0]  11.94,68.58 0 bottom
U$103  [QWIIC_4MM]  25.15,65.34 0 top
U$104  [PWR0]  11.81,67.75 0 top
U$105  [MIDPOINT0]  25.02,72.26 0 bottom
U$106  [QWIICBUS#WORKING#LOGO#JPG]  19.05,77.22 0 bottom
U$107  [#I2C#0]  29.78,66.17 0 top
U$108  [#VCC2#0]  30.99,84.52 270 bottom
U$109  [#GND2#0]  28.45,84.58 270 bottom
U$110  [#PSEL#0]  27.81,74.3 270 bottom
U$111  [10]  26.16,70.55 270 bottom
U$112  [20]  26.23,74.87 270 bottom
U$113  [#GND2#0]  43.69,81.98 90 bottom
U$114  [#GND1#0]  43.69,64.77 270 bottom
U$115  [#BP#0]  34.8,71.44 270 bottom
U$116  [#GND#0]  54.86,78.74 0 top
U$117  [#3V3#0]  54.86,76.2 0 top
U$118  [#SDA#0]  54.86,73.66 0 top
U$119  [#SCL#0]  54.86,71.12 0 top
U$120  [#EN#0]  54.86,68.58 0 top
U$121  [#GND#0]  59.31,78.74 0 bottom
U$122  [#3V3#0]  59.31,76.2 0 bottom
U$123  [#SDA#0]  59.31,73.66 0 bottom
U$124  [#SCL#0]  59.05,71.12 0 bottom
U$125  [#EN#0]  58.17,68.58 0 bottom
U$126  [QWIIC_4MM]  71.37,65.34 0 top
U$127  [PWR0]  58.04,67.75 0 top
U$128  [MIDPOINT0]  71.25,72.26 0 bottom
U$129  [QWIICBUS#WORKING#LOGO#JPG]  65.28,77.22 0 bottom
U$130  [#I2C#0]  76.01,66.17 0 top
U$131  [#VCC2#0]  77.22,84.52 270 bottom
U$132  [#GND2#0]  74.68,84.58 270 bottom
U$133  [#PSEL#0]  74.04,74.3 270 bottom
U$134  [10]  72.39,70.55 270 bottom
U$135  [20]  72.45,74.87 270 bottom
U$136  [#GND2#0]  89.92,81.98 90 bottom
U$137  [#GND1#0]  89.92,64.77 270 bottom
U$138  [#BP#0]  81.03,71.44 270 bottom
U$139  [#GND#0]  101.09,78.74 0 top
U$140  [#3V3#0]  101.09,76.2 0 top
U$141  [#SDA#0]  101.09,73.66 0 top
U$142  [#SCL#0]  101.09,71.12 0 top
U$143  [#EN#0]  101.09,68.58 0 top
U$144  [#GND#0]  105.54,78.74 0 bottom
U$145  [#3V3#0]  105.54,76.2 0 bottom
U$146  [#SDA#0]  105.54,73.66 0 bottom
U$147  [#SCL#0]  105.28,71.12 0 bottom
U$148  [#EN#0]  104.39,68.58 0 bottom
U$149  [QWIIC_4MM]  117.6,65.34 0 top
U$150  [PWR0]  104.27,67.75 0 top
U$151  [MIDPOINT0]  117.48,72.26 0 bottom
U$152  [QWIICBUS#WORKING#LOGO#JPG]  111.51,77.22 0 bottom
U$153  [#I2C#0]  122.24,66.17 0 top
U$154  [#VCC2#0]  123.44,84.52 270 bottom
U$155  [#GND2#0]  120.9,84.58 270 bottom
U$156  [#PSEL#0]  120.27,74.3 270 bottom
U$157  [10]  118.62,70.55 270 bottom
U$158  [20]  118.68,74.87 270 bottom
U$159  [#GND2#0]  136.14,81.98 90 bottom
U$160  [#GND1#0]  136.14,64.77 270 bottom
U$161  [#BP#0]  127.25,71.44 270 bottom
U$162  [#GND#0]  147.32,78.74 0 top
U$163  [#3V3#0]  147.32,76.2 0 top
U$164  [#SDA#0]  147.32,73.66 0 top
U$165  [#SCL#0]  147.32,71.12 0 top
U$166  [#EN#0]  147.32,68.58 0 top
U$167  [#GND#0]  151.77,78.74 0 bottom
U$168  [#3V3#0]  151.77,76.2 0 bottom
U$169  [#SDA#0]  151.77,73.66 0 bottom
U$170  [#SCL#0]  151.51,71.12 0 bottom
U$171  [#EN#0]  150.62,68.58 0 bottom
U$172  [QWIIC_4MM]  163.83,65.34 0 top
U$173  [PWR0]  150.5,67.75 0 top
U$174  [MIDPOINT0]  163.7,72.26 0 bottom
U$175  [QWIICBUS#WORKING#LOGO#JPG]  157.73,77.22 0 bottom
U$176  [#I2C#0]  168.47,66.17 0 top
U$177  [#VCC2#0]  169.67,84.52 270 bottom
U$178  [#GND2#0]  167.13,84.58 270 bottom
U$179  [#PSEL#0]  166.5,74.3 270 bottom
U$180  [10]  164.85,70.55 270 bottom
U$181  [20]  164.91,74.87 270 bottom
U$182  [#GND2#0]  182.37,81.98 90 bottom
U$183  [#GND1#0]  182.37,64.77 270 bottom
U$184  [#BP#0]  173.48,71.44 270 bottom

## Library data of the parts
BP BP1-BP7 GND\ GND\1-GND\7 HV_GND HV_GND1-HV_GND7 I2C I2C1-I2C7 PSEL PSEL1-PSEL7 PWR PWR1-PWR7 = SparkFun-Jumpers
C1 C2 C13 C16 C29 C30 C43 C44 C57 C58 C71 C72 C85 C86 C99 C100 = SparkFun-Capacitors; PROD_ID: CAP-00810
C3-C5 C17 C18 C23 C31 C32 C37 C45 C46 C51 C59 C60 C65 C73 C74 C79 C87 C88 C93 C101 C102 C107 = SparkFun-Capacitors; PROD_ID: CAP-00868
C6 C7 C24 C25 C38 C39 C52 C53 C66 C67 C80 C81 C94 C95 C108 C109 = SparkFun-Capacitors; PROD_ID: CAP-15457
C8 C15 C26 C27 C40 C41 C54 C55 C68 C69 C82 C83 C96 C97 C110 C111 = SparkFun-Capacitors; PROD_ID: CAP-15456
C9 C14 C19 C22 C33 C36 C47 C50 C61 C64 C75 C78 C89 C92 C103 C106 = SparkFun-Capacitors; PROD_ID: CAP-08390
C10 C11 C20 C21 C34 C35 C48 C49 C62 C63 C76 C77 C90 C91 C104 C105 = SparkFun-Capacitors; PROD_ID: CAP-10381
C12 C28 C42 C56 C70 C84 C98 C112 = SparkFun-Capacitors; PROD_ID: CAP-15455
D1-D7 D11 = SparkFun-LED; PROD_ID: DIO-00819
E$1-E$4 FD1-FD32 LOGO1-LOGO24 U$22 U$34 U$57 U$80 U$103 U$126 U$149 U$172 = SparkFun-Aesthetics
E$5 E$6 = SparkFun-Retired
H1-H24 = SparkFun-Hardware
J1 J2 J8 J9 J15 J16 J22 J23 J29 J30 J36 J37 J43 J44 J50 J51 = SparkFun-Connectors; PROD_ID: CONN-13694; VALUE: QWIIC_RIGHT_ANGLE
J3 J7 J10 J11 J17 J18 J24 J25 J31 J32 J38 J39 J45 J46 J52 J53 = SparkFun-Connectors; PROD_ID: CONN-08506; SF_ID: PRT-00643
J4 J6 J13 J14 J20 J21 J27 J28 J34 J35 J41 J42 J48 J49 J55 J56 TP1-TP8 = SparkFun-Connectors
J5 J12 J19 J26 J33 J40 J47 J54 = SparkFun-Connectors; PROD_ID: CONN-09696
L1-L8 = SparkFun-Coils; PROD_ID: NDUC-15453
R1 R3 R9 R12 R16 R18 R22 R24 R28 R30 R34 R36 R40 R42 R46 R48 = SparkFun-Resistors; PROD_ID: RES-07828
R2 R10 R17 R23 R29 R35 R41 R47 = SparkFun-Resistors; PROD_ID: RES-07858
R4 R5 R7 R8 R13 R14 R19 R20 R25 R26 R31 R32 R37 R38 R43 R44 = SparkFun-Resistors; PROD_ID: RES-07857
R6 R11 R15 R21 R27 R33 R39 R45 = SparkFun-Resistors; PROD_ID: RES-07856
U1 U2 U5 U7 U9 U11 U13 U15 = SparkFun-IC-Comms; PROD_ID: IC-13899
U3 U4 U6 U8 U10 U12 U14 U16 = SparkFun-IC-Power; PROD_ID: VREG-15445
U$1-U$14 U$16-U$21 U$23-U$33 U$35 U$36 U$38-U$56 U$58 U$59 U$61-U$79 U$81 U$82 U$84-U$102 U$104 U$105 U$107-U$125 U$127 U$128 U$130-U$148 U$150 U$151 U$153-U$171 U$173 U$174 U$176-U$184 = output
U$15 U$37 U$60 U$83 U$106 U$129 U$152 U$175 = QwiicBus#working#Logo#jpg (2)

## Nets
3.3V: BP.1 C1.1 C2.1 C3.1 C4.1 C10.1 C11.1 C14.1 D11.A I2C.2 J1.2 J2.2 J5.2 L2.P$2 R1.2 U1.1
3.3V1: BP1.1 C13.1 C16.1 C17.1 C18.1 C20.1 C21.1 C22.1 D1.A I2C1.2 J8.2 J9.2 J12.2 L1.P$2 R9.2 U2.1
3.3V2: BP2.1 C29.1 C30.1 C31.1 C32.1 C34.1 C35.1 C36.1 D2.A I2C2.2 J15.2 J16.2 J19.2 L3.P$2 R16.2 U5.1
3.3V3: BP3.1 C43.1 C44.1 C45.1 C46.1 C48.1 C49.1 C50.1 D3.A I2C3.2 J22.2 J23.2 J26.2 L4.P$2 R22.2 U7.1
3.3V4: BP4.1 C57.1 C58.1 C59.1 C60.1 C62.1 C63.1 C64.1 D4.A I2C4.2 J29.2 J30.2 J33.2 L5.P$2 R28.2 U9.1
3.3V5: BP5.1 C71.1 C72.1 C73.1 C74.1 C76.1 C77.1 C78.1 D5.A I2C5.2 J36.2 J37.2 J40.2 L6.P$2 R34.2 U11.1
3.3V6: BP6.1 C85.1 C86.1 C87.1 C88.1 C90.1 C91.1 C92.1 D6.A I2C6.2 J43.2 J44.2 J47.2 L7.P$2 R40.2 U13.1
3.3V7: BP7.1 C99.1 C100.1 C101.1 C102.1 C104.1 C105.1 C106.1 D7.A I2C7.2 J50.2 J51.2 J54.2 L8.P$2 R46.2 U15.1
BLUE_N: GND\.2 J3.5 J7.5
BLUE_N1: GND\1.2 J10.5 J11.5
BLUE_N2: GND\2.2 J17.5 J18.5
BLUE_N3: GND\3.2 J24.5 J25.5
BLUE_N4: GND\4.2 J31.5 J32.5
BLUE_N5: GND\5.2 J38.5 J39.5
BLUE_N6: GND\6.2 J45.5 J46.5
BLUE_N7: GND\7.2 J52.5 J53.5
DSCL_N: J3.1 J7.1 U1.6
DSCL_N1: J10.1 J11.1 U2.6
DSCL_N2: J17.1 J18.1 U5.6
DSCL_N3: J24.1 J25.1 U7.6
DSCL_N4: J31.1 J32.1 U9.6
DSCL_N5: J38.1 J39.1 U11.6
DSCL_N6: J45.1 J46.1 U13.6
DSCL_N7: J52.1 J53.1 U15.6
DSCL_P: J3.2 J7.2 U1.7
DSCL_P1: J10.2 J11.2 U2.7
DSCL_P2: J17.2 J18.2 U5.7
DSCL_P3: J24.2 J25.2 U7.7
DSCL_P4: J31.2 J32.2 U9.7
DSCL_P5: J38.2 J39.2 U11.7
DSCL_P6: J45.2 J46.2 U13.7
DSCL_P7: J52.2 J53.2 U15.7
DSDA_N: J3.7 J7.7 U1.9
DSDA_N1: J10.7 J11.7 U2.9
DSDA_N2: J17.7 J18.7 U5.9
DSDA_N3: J24.7 J25.7 U7.9
DSDA_N4: J31.7 J32.7 U9.9
DSDA_N5: J38.7 J39.7 U11.9
DSDA_N6: J45.7 J46.7 U13.9
DSDA_N7: J52.7 J53.7 U15.9
DSDA_P: J3.8 J7.8 U1.8
DSDA_P1: J10.8 J11.8 U2.8
DSDA_P2: J17.8 J18.8 U5.8
DSDA_P3: J24.8 J25.8 U7.8
DSDA_P4: J31.8 J32.8 U9.8
DSDA_P5: J38.8 J39.8 U11.8
DSDA_P6: J45.8 J46.8 U13.8
DSDA_P7: J52.8 J53.8 U15.8
EN: J4.1 U1.3
EN1: J14.1 U2.3
EN2: J21.1 U5.3
EN3: J28.1 U7.3
EN4: J35.1 U9.3
EN5: J42.1 U11.3
EN6: J49.1 U13.3
EN7: J56.1 U15.3
GND: C1.2 C2.2 C3.2 C4.2 C5.2 C6.2 C7.2 C8.2 C10.2 C11.2 C12.- C14.2 C15.2 GND\.1 HV_GND.1 J1.1 J2.1 J5.1 PWR.1 R2.1 U1.5 U3.1 U3.6 U3.11
GND1: C13.2 C16.2 C17.2 C18.2 C20.2 C21.2 C22.2 C23.2 C24.2 C25.2 C26.2 C27.2 C28.- GND\1.1 HV_GND1.1 J8.1 J9.1 J12.1 PWR1.1 R10.1 U2.5 U4.1 U4.6 U4.11
GND2: C29.2 C30.2 C31.2 C32.2 C34.2 C35.2 C36.2 C37.2 C38.2 C39.2 C40.2 C41.2 C42.- GND\2.1 HV_GND2.1 J15.1 J16.1 J19.1 PWR2.1 R17.1 U5.5 U6.1 U6.6 U6.11
GND3: C43.2 C44.2 C45.2 C46.2 C48.2 C49.2 C50.2 C51.2 C52.2 C53.2 C54.2 C55.2 C56.- GND\3.1 HV_GND3.1 J22.1 J23.1 J26.1 PWR3.1 R23.1 U7.5 U8.1 U8.6 U8.11
GND4: C57.2 C58.2 C59.2 C60.2 C62.2 C63.2 C64.2 C65.2 C66.2 C67.2 C68.2 C69.2 C70.- GND\4.1 HV_GND4.1 J29.1 J30.1 J33.1 PWR4.1 R29.1 U9.5 U10.1 U10.6 U10.11
GND5: C71.2 C72.2 C73.2 C74.2 C76.2 C77.2 C78.2 C79.2 C80.2 C81.2 C82.2 C83.2 C84.- GND\5.1 HV_GND5.1 J36.1 J37.1 J40.1 PWR5.1 R35.1 U11.5 U12.1 U12.6 U12.11
GND6: C85.2 C86.2 C87.2 C88.2 C90.2 C91.2 C92.2 C93.2 C94.2 C95.2 C96.2 C97.2 C98.- GND\6.1 HV_GND6.1 J43.1 J44.1 J47.1 PWR6.1 R41.1 U13.5 U14.1 U14.6 U14.11
GND7: C99.2 C100.2 C101.2 C102.2 C104.2 C105.2 C106.2 C107.2 C108.2 C109.2 C110.2 C111.2 C112.- GND\7.1 HV_GND7.1 J50.1 J51.1 J54.1 PWR7.1 R47.1 U15.5 U16.1 U16.6 U16.11
GRN_N: HV_GND.2 J3.6 J6.2 J7.6
GRN_N1: HV_GND1.2 J10.6 J11.6 J13.2
GRN_N2: HV_GND2.2 J17.6 J18.6 J20.2
GRN_N3: HV_GND3.2 J24.6 J25.6 J27.2
GRN_N4: HV_GND4.2 J31.6 J32.6 J34.2
GRN_N5: HV_GND5.2 J38.6 J39.6 J41.2
GRN_N6: HV_GND6.2 J45.6 J46.6 J48.2
GRN_N7: HV_GND7.2 J52.6 J53.6 J55.2
N$1: C9.1 U3.4
N$2: I2C1.1 R5.2
N$3: I2C.1 R8.2
N$4: I2C.3 R7.2
N$5: I2C1.3 R4.2
N$6: R1.1 R2.2 U3.7
N$7: R3.1 U3.8
N$8: D1.C R6.1
N$9: C5.1 R3.2 U3.5
N$10: PWR1.2 R6.2
N$11: C19.1 U4.4
N$12: R9.1 R10.2 U4.7
N$13: D11.C R11.1
N$14: PWR.2 R11.2
N$15: R12.1 U4.8
N$16: C23.1 R12.2 U4.5
N$17: I2C2.1 R14.2
N$18: I2C2.3 R13.2
N$19: D2.C R15.1
N$20: PWR2.2 R15.2
N$21: C33.1 U6.4
N$22: R16.1 R17.2 U6.7
N$23: R18.1 U6.8
N$24: C37.1 R18.2 U6.5
N$25: I2C3.1 R20.2
N$26: I2C3.3 R19.2
N$27: D3.C R21.1
N$28: PWR3.2 R21.2
N$29: C47.1 U8.4
N$30: R22.1 R23.2 U8.7
N$31: R24.1 U8.8
N$32: C51.1 R24.2 U8.5
N$33: I2C4.1 R26.2
N$34: I2C4.3 R25.2
N$35: D4.C R27.1
N$36: PWR4.2 R27.2
N$37: C61.1 U10.4
N$38: R28.1 R29.2 U10.7
N$39: R30.1 U10.8
N$40: C65.1 R30.2 U10.5
N$41: I2C5.1 R32.2
N$42: I2C5.3 R31.2
N$43: D5.C R33.1
N$44: PWR5.2 R33.2
N$45: C75.1 U12.4
N$46: R34.1 R35.2 U12.7
N$47: R36.1 U12.8
N$48: C79.1 R36.2 U12.5
N$49: I2C6.1 R38.2
N$50: I2C6.3 R37.2
N$51: D6.C R39.1
N$52: PWR6.2 R39.2
N$53: C89.1 U14.4
N$54: R40.1 R41.2 U14.7
N$55: R42.1 U14.8
N$56: C93.1 R42.2 U14.5
N$57: I2C7.1 R44.2
N$58: I2C7.3 R43.2
N$59: D7.C R45.1
N$60: PWR7.2 R45.2
N$61: C103.1 U16.4
N$62: R46.1 R47.2 U16.7
N$63: R48.1 U16.8
N$64: C107.1 R48.2 U16.5
SCL: J1.4 J2.4 J5.4 R7.1 U1.4
SCL1: J8.4 J9.4 J12.4 R4.1 U2.4
SCL2: J15.4 J16.4 J19.4 R13.1 U5.4
SCL3: J22.4 J23.4 J26.4 R19.1 U7.4
SCL4: J29.4 J30.4 J33.4 R25.1 U9.4
SCL5: J36.4 J37.4 J40.4 R31.1 U11.4
SCL6: J43.4 J44.4 J47.4 R37.1 U13.4
SCL7: J50.4 J51.4 J54.4 R43.1 U15.4
SDA: J1.3 J2.3 J5.3 R8.1 U1.2
SDA1: J8.3 J9.3 J12.3 R5.1 U2.2
SDA2: J15.3 J16.3 J19.3 R14.1 U5.2
SDA3: J22.3 J23.3 J26.3 R20.1 U7.2
SDA4: J29.3 J30.3 J33.3 R26.1 U9.2
SDA5: J36.3 J37.3 J40.3 R32.1 U11.2
SDA6: J43.3 J44.3 J47.3 R38.1 U13.2
SDA7: J50.3 J51.3 J54.3 R44.1 U15.2
SW: C9.2 L2.P$1 U3.3 U3.12
SW1: C19.2 L1.P$1 U4.3 U4.12
SW2: C33.2 L3.P$1 U6.3 U6.12
SW3: C47.2 L4.P$1 U8.3 U8.12
SW4: C61.2 L5.P$1 U10.3 U10.12
SW5: C75.2 L6.P$1 U12.3 U12.12
SW6: C89.2 L7.P$1 U14.3 U14.12
SW7: C103.2 L8.P$1 U16.3 U16.12
VCC_1: BP.2 J3.4 J7.4 PSEL.3 TP1.P$1 U1.10
VCC_2: J3.3 J6.1 J7.3 PSEL.1
VCC_3: BP1.2 J10.4 J11.4 PSEL1.3 TP2.P$1 U2.10
VCC_4: J10.3 J11.3 J13.1 PSEL1.1
VCC_5: BP2.2 J17.4 J18.4 PSEL2.3 TP3.P$1 U5.10
VCC_6: J17.3 J18.3 J20.1 PSEL2.1
VCC_7: BP3.2 J24.4 J25.4 PSEL3.3 TP4.P$1 U7.10
VCC_8: J24.3 J25.3 J27.1 PSEL3.1
VCC_9: BP4.2 J31.4 J32.4 PSEL4.3 TP5.P$1 U9.10
VCC_10: J31.3 J32.3 J34.1 PSEL4.1
VCC_11: BP5.2 J38.4 J39.4 PSEL5.3 TP6.P$1 U11.10
VCC_12: J38.3 J39.3 J41.1 PSEL5.1
VCC_13: BP6.2 J45.4 J46.4 PSEL6.3 TP7.P$1 U13.10
VCC_14: J45.3 J46.3 J48.1 PSEL6.1
VCC_15: BP7.2 J52.4 J53.4 PSEL7.3 TP8.P$1 U15.10
VCC_16: J52.3 J53.3 J55.1 PSEL7.1
VREG_IN: C6.1 C7.1 C8.1 C12.+ C15.1 PSEL.2 U3.2 U3.9 U3.10
VREG_IN1: C24.1 C25.1 C26.1 C27.1 C28.+ PSEL1.2 U4.2 U4.9 U4.10
VREG_IN2: C38.1 C39.1 C40.1 C41.1 C42.+ PSEL2.2 U6.2 U6.9 U6.10
VREG_IN3: C52.1 C53.1 C54.1 C55.1 C56.+ PSEL3.2 U8.2 U8.9 U8.10
VREG_IN4: C66.1 C67.1 C68.1 C69.1 C70.+ PSEL4.2 U10.2 U10.9 U10.10
VREG_IN5: C80.1 C81.1 C82.1 C83.1 C84.+ PSEL5.2 U12.2 U12.9 U12.10
VREG_IN6: C94.1 C95.1 C96.1 C97.1 C98.+ PSEL6.2 U14.2 U14.9 U14.10
VREG_IN7: C108.1 C109.1 C110.1 C111.1 C112.+ PSEL7.2 U16.2 U16.9 U16.10